# Altium PCB base_tiempo.PcbDoc (part 2 of 2)
Units mil, origin at the board's own origin, x right, y up, seen from the top; angles counter-clockwise.
Board outline 9832.52 x 6640 mil, 2 copper layers (Top Layer, Bottom Layer); 176 components, 434 nets, 905 pads, 136 vias.
Unrouted connection lines stored in the file: 2.
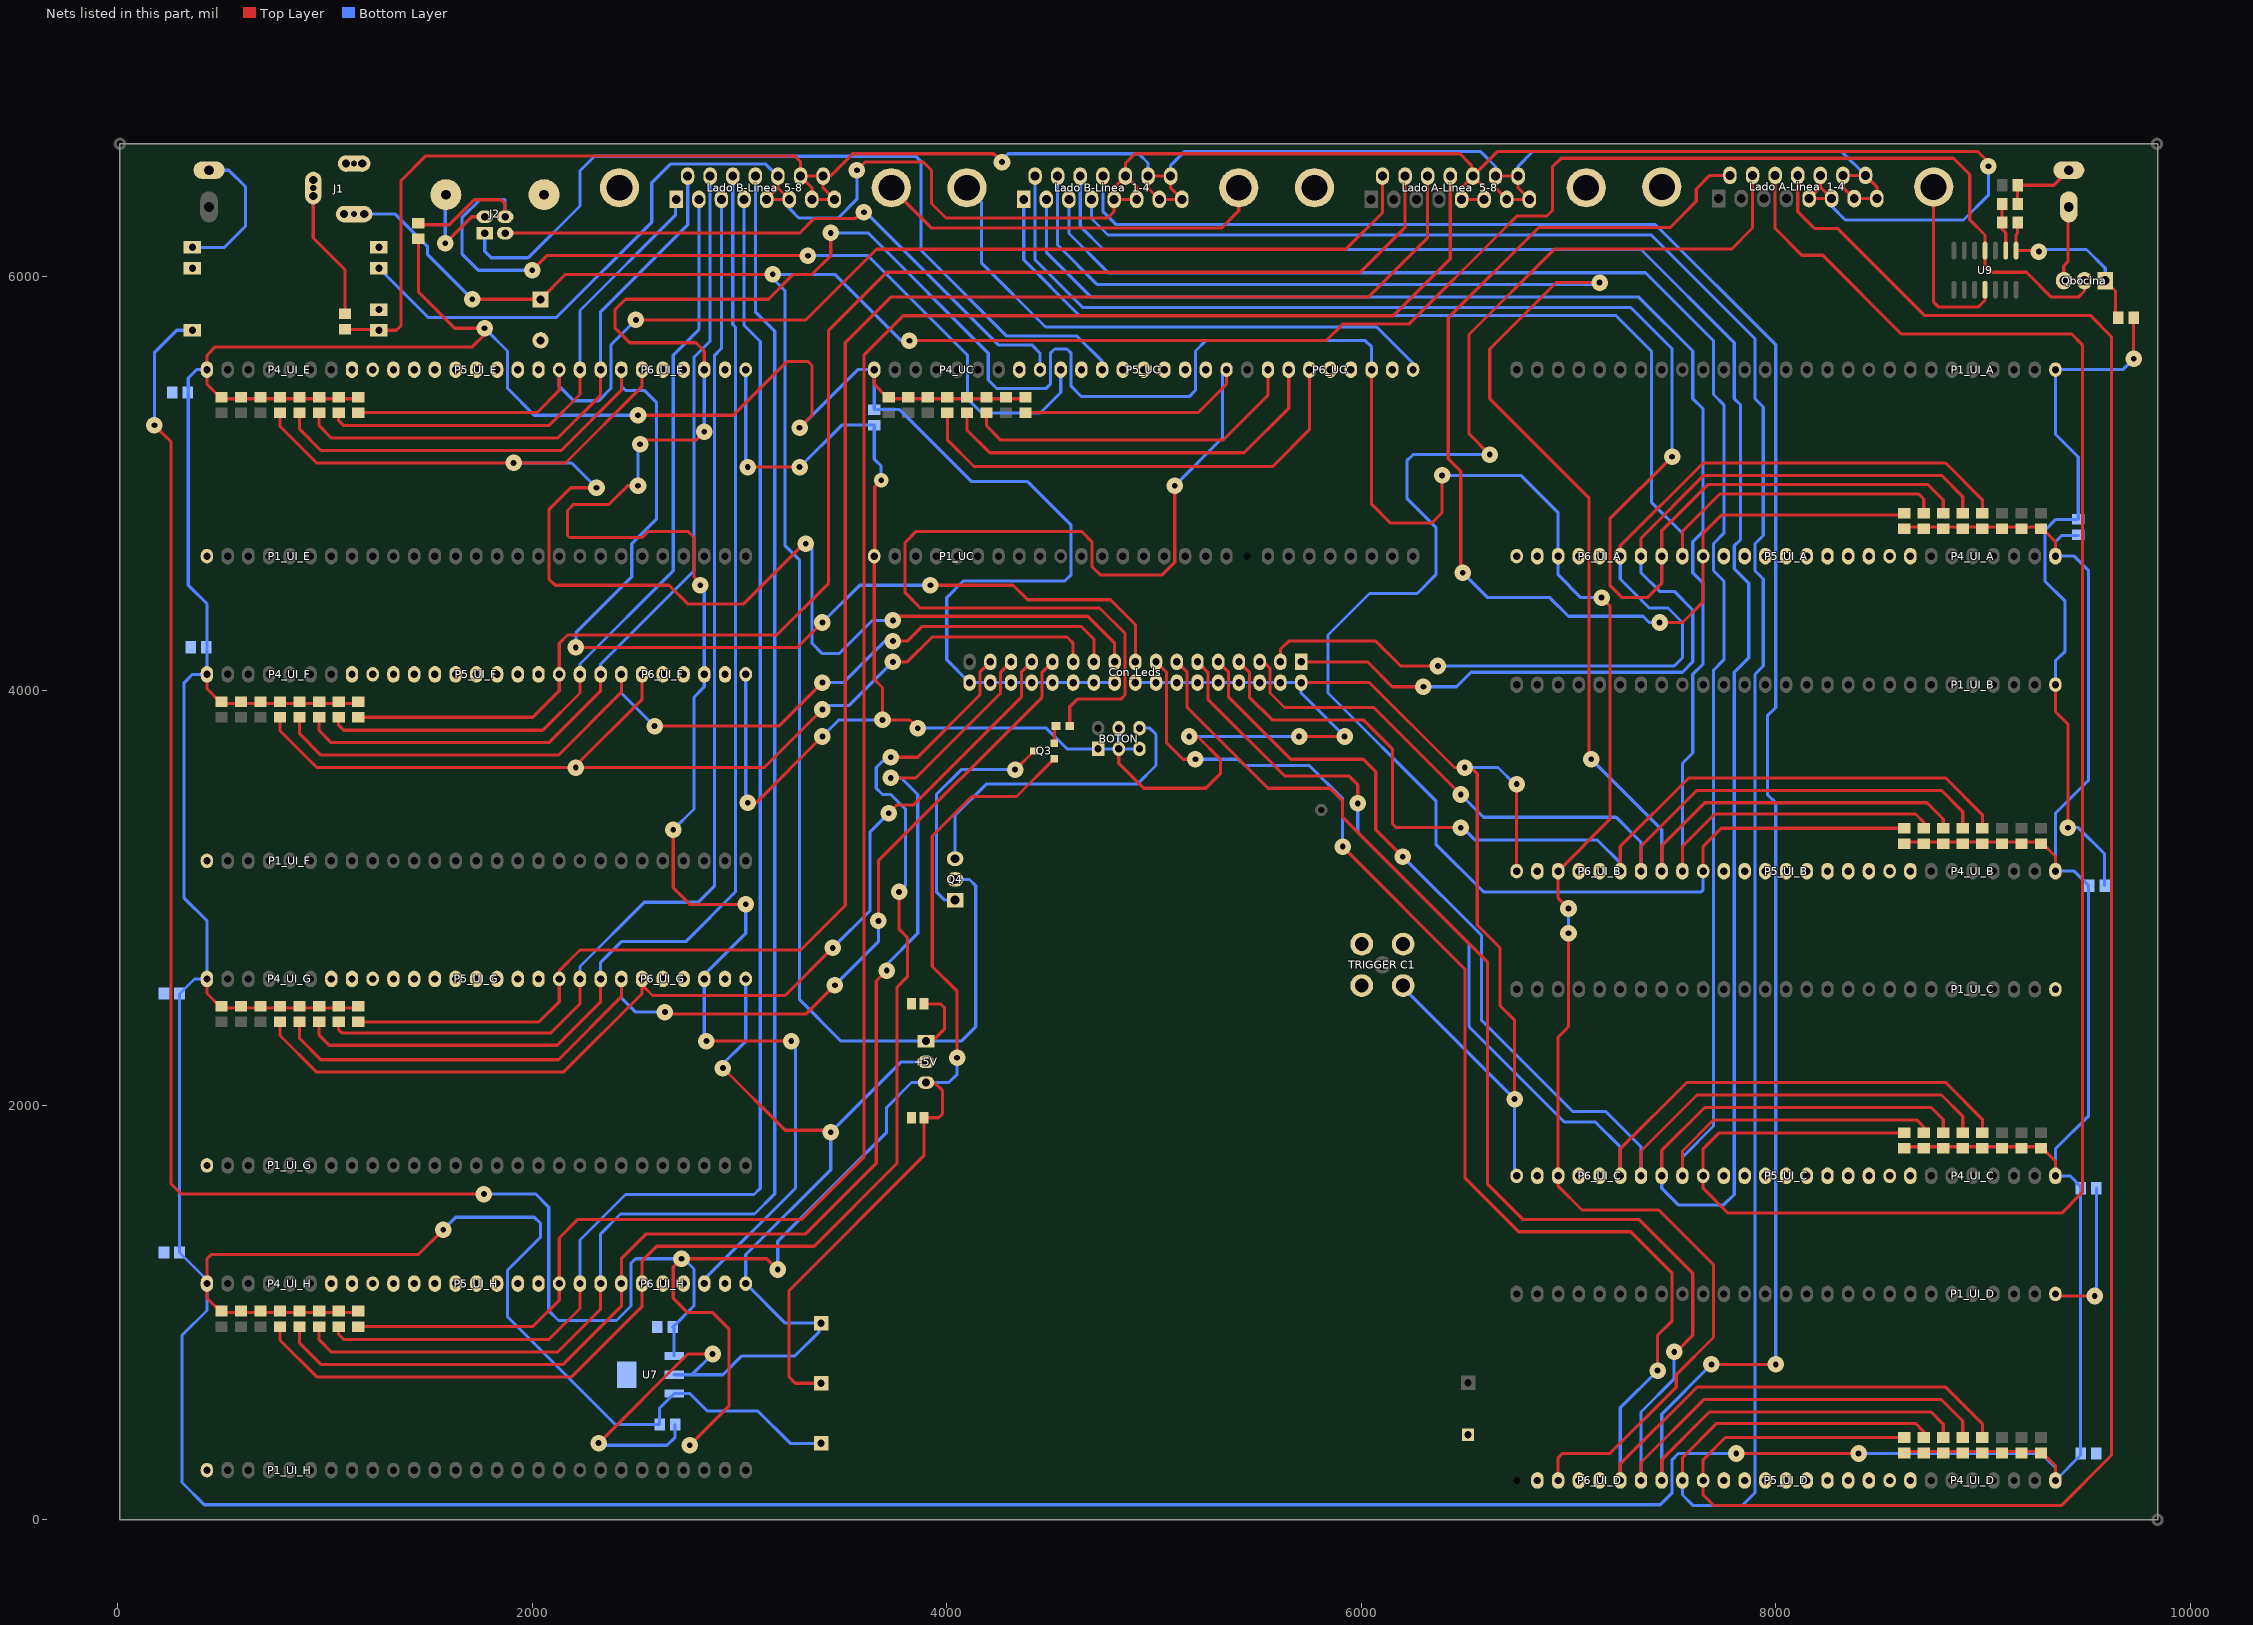
[diagram p2: the nets of this part, all layers, seen from the top]

## Via types
v1: diameter 80, hole 28, Top Layer to Bottom Layer, 135 vias
v2: diameter 70, hole 28, Top Layer to Bottom Layer, 1 vias

## Nets (pads, with @x,y where several pads share a name; then routed paths per layer and width w, separated by ;. In a path a pad name is that pad's centre, name@x,y a point inside that pad or via, vN(x,y) a via of type N, cw(c..) or ccw(c..) an arc to the next point about the centre after c; other vN are vias at no path point) (continued)
34_UI_G: P4_UI_G.3
34_UI_H: P4_UI_H.3
35_UC: P4_UC.2
35_UI_A: P4_UI_A.2
35_UI_B: P4_UI_B.2
35_UI_C: P4_UI_C.2
35_UI_D: P4_UI_D.2
35_UI_E: P4_UI_E.2
35_UI_F: P4_UI_F.2
35_UI_G: P4_UI_G.2
35_UI_H: P4_UI_H.2
36_UC: J2.2 P4_UC.1 pad.0@4449.58,5549.11 | length 2984.3
  Top Layer w15: J2.2@1868.79,6208.17 3288.64,6208.17 3359.58,6279.11 3559.58,6279.11 3589.58,6309.11 v1(3599.58,6309.11)
  Bottom Layer w15: v1(3599.58,6309.11) 3607.89,6309.11 4247.89,5669.11 4409.58,5669.11 4449.58,5629.11 P4_UC.1@4449.58,5549.11
36_UI_A: P4_UI_A.1 pad.8
36_UI_B: P4_UI_B.1 pad.14
36_UI_C: P4_UI_C.1 pad.20
36_UI_D: P4_UI_D.1 pad.25
36_UI_E: P4_UI_E.1 pad.52
36_UI_F: P4_UI_F.1 pad.46
36_UI_G: P4_UI_G.1 pad.38
36_UI_H: P4_UI_H.1 pad.32
37_UC: J2.3 P5_UC.9 R_PU_USB.1 | length 4583.3
  Top Layer w15: R_PU_USB.1@1449.58,6248.64 1599.11,6248.64 1719.58,6369.11 1849.58,6369.11 1868.79,6349.9 J2.3@1868.79,6286.91 ; v1(1999.58,6029.11) 2069.58,6099.11 v1(3329.58,6099.11)
  Bottom Layer w15: J2.3@1868.79,6286.91 1868.79,6369.9 1746.9,6369.9 1659.58,6282.58 1659.58,6109.11 1739.58,6029.11 v1(1999.58,6029.11) ; v1(3329.58,6099.11) 3619.58,6099.11 4099.58,5619.11 4099.58,5409.11 4169.58,5339.11 4449.58,5339.11 4549.58,5439.11 P5_UC.9@4549.58,5549.11
37_UI_A: P5_UI_A.9
37_UI_B: P5_UI_B.9
37_UI_C: P5_UI_C.9
37_UI_D: P5_UI_D.9
37_UI_E: P5_UI_E.9
37_UI_F: P5_UI_F.9
37_UI_G: P5_UI_G.9
37_UI_H: P5_UI_H.9
38_UC: P5_UC.8
38_UI_A: P5_UI_A.8
38_UI_B: P5_UI_B.8
38_UI_C: P5_UI_C.8
38_UI_D: P5_UI_D.8
38_UI_E: P5_UI_E.8
38_UI_F: P5_UI_F.8
38_UI_G: P5_UI_G.8
38_UI_H: P5_UI_H.8
39_UC: J2.1 P5_UC.7 | length 4084
  Bottom Layer w15: J2.1@1770.37,6208.17 1770.37,6119.9 1801.16,6089.11 1979.58,6089.11 2229.58,6339.11 2229.58,6509.11 2299.58,6579.11 3849.58,6579.11 3876,6552.69 3876,6124 4289,5711 4627.69,5711 4749.58,5589.11 P5_UC.7@4749.58,5549.11
39_UI_A: P5_UI_A.7
39_UI_B: P5_UI_B.7
39_UI_C: P5_UI_C.7
39_UI_D: P5_UI_D.7
39_UI_E: P5_UI_E.7
39_UI_F: P5_UI_F.7
39_UI_G: P5_UI_G.7
39_UI_H: P5_UI_H.7
40_UC: P5_UC.6
40_UI_A: P5_UI_A.6
40_UI_B: P5_UI_B.6
40_UI_C: P5_UI_C.6
40_UI_D: P5_UI_D.6
40_UI_E: P5_UI_E.6
40_UI_F: P5_UI_F.6
40_UI_G: P5_UI_G.6
40_UI_H: P5_UI_H.6
41_UC: P5_UC.5
41_UI_A: P5_UI_A.5
41_UI_B: P5_UI_B.5
41_UI_C: P5_UI_C.5
41_UI_D: P5_UI_D.5
41_UI_E: P5_UI_E.5
41_UI_F: P5_UI_F.5
41_UI_G: P5_UI_G.5
41_UI_H: P5_UI_H.5
42_UC: P5_UC.4
42_UI_A: P5_UI_A.4
42_UI_B: P5_UI_B.4
42_UI_C: P5_UI_C.4
42_UI_D: P5_UI_D.4
42_UI_E: P5_UI_E.4
42_UI_F: P5_UI_F.4
42_UI_G: P5_UI_G.4
42_UI_H: P5_UI_H.4
43_UC: P5_UC.3
43_UI_A: P5_UI_A.3
43_UI_B: P5_UI_B.3
43_UI_C: P5_UI_C.3
43_UI_D: P5_UI_D.3
43_UI_E: P5_UI_E.3
43_UI_F: P5_UI_F.3
43_UI_G: P5_UI_G.3
43_UI_H: P5_UI_H.3
44_UC: P5_UC.2
44_UI_A: P5_UI_A.2
44_UI_B: P5_UI_B.2
44_UI_C: P5_UI_C.2
44_UI_D: P5_UI_D.2
44_UI_E: P5_UI_E.2
44_UI_F: P5_UI_F.2
44_UI_G: P5_UI_G.2
44_UI_H: P5_UI_H.2
45_UC: P5_UC.1 pad.3@5349.58,5549.11 R4_UC.1 R_BOTON.2 | length 5707.9
  Top Layer w15: 3799,4689 3799,4715 3853.11,4769.11 4649.58,4769.11 4699.58,4719.11 4699.58,4599.11 4739.58,4559.11 5039.58,4559.11 5099.53,4619.06 ; 3799,4696 3799,4472 3871.89,4399.11 4736.89,4399.11 4859.58,4276.42 4859.58,3979.11 4839.58,3959.11 4629.58,3959.11 4593.05,3922.57 R_BOTON.2@4593.05,3829.11 ; R4_UC.1@4379.58,5341.71 5212.18,5341.71 5349.58,5479.11 P5_UC.1@5349.58,5549.11 ; 5099.58,4619.01 v1(5099.58,4989.11)
  Bottom Layer w15: v1(5099.58,4989.11) 5329.58,5219.11 5329.58,5529.11 P5_UC.1@5349.58,5549.11
45_UI_A: "Lado A-Linea  1-4.9" P5_UI_A.1 pad.9 R4_UI_A.1 | length 5584.5
  Top Layer w15: v1(6489.58,4569.11) 6479.58,4579.11 6479.58,5059.11 6419.58,5119.11 6419.58,5799.11 6856,6235.53 7490.53,6235.53 7616,6361 7616,6421 7681.83,6486.83 7778.83,6486.83 ; v1(7439.58,4329.11) 7449.58,4339.11 7459.58,4329.11 7549.58,4329.11 7649.58,4429.11 P5_UI_A.1@7649.58,4649.11 7649.58,4759.11 7739.11,4848.64 R4_UI_A.1@8619.58,4848.64
  Bottom Layer w15: v1(6489.58,4569.11) 6609.58,4449.11 6909.58,4449.11 6999.58,4359.11 7359.58,4359.11 7389.58,4329.11 v1(7439.58,4329.11)
45_UI_B: "Lado A-Linea  1-4.10" P5_UI_B.1 pad.15 R4_UI_B.1 | length 7948
  Top Layer w15: v1(6619.58,5139.11) 6519.58,5239.11 6519.58,5719.11 6931.47,6131 7786,6131 7887.89,6232.89 7887.89,6486.83 ; P5_UI_B.1@7649.58,3129.11 7649.58,3249.11 7736.98,3336.51 R4_UI_B.1@8619.58,3336.51
  Bottom Layer w15: v1(6619.58,5139.11) 6249.58,5139.11 6219.58,5109.11 6219.58,4929.11 6359.58,4789.11 6359.58,4559.11 6269.58,4469.11 6039.58,4469.11 5839.58,4269.11 5839.58,3989.11 6359.58,3469.11 6359.58,3259.11 6589.58,3029.11 7639.58,3029.11 7649.58,3039.11 P5_UI_B.1@7649.58,3129.11
45_UI_C: "Lado A-Linea  1-4.11" P5_UI_C.1 pad.21 R4_UI_C.1 | length 9174.9
  Top Layer w15: 7996.94,6486.83 7996.94,6230.06 8126,6101 8226,6101 8606,5721 9427.69,5721 9479.58,5669.11 9479.58,1579.11 9379.58,1479.11 7769.58,1479.11 7649.58,1599.11 P5_UI_C.1@7649.58,1659.11 7649.58,1789.11 7726.98,1866.51 R4_UI_C.1@8619.58,1866.51
45_UI_D: "Lado A-Linea  1-4.12" P5_UI_D.1 pad.24 R4_UI_D.1 | length 10613.3
  Top Layer w15: 8106,6486.83 8106,6311 8186,6231 8296,6231 8716,5811 9517.69,5811 9619.58,5709.11 9619.58,309.11 9379.58,69.11 7699.58,69.11 7649.58,119.11 P5_UI_D.1@7649.58,189.11 7649.58,289.11 7756.98,396.51 R4_UI_D.1@8619.58,396.51
45_UI_E: "Lado A-Linea  5-8.9" P5_UI_E.1 pad.51 R4_UI_E.1 | length 5870.9
  Top Layer w15: R4_UI_E.1@1159.58,5341.71 2022.18,5341.71 2129.58,5449.11 P5_UI_E.1@2129.58,5549.11 ; v1(2499.58,5789.11) 3319.58,5789.11 3660.47,6130 5925,6130 6102.17,6307.17 6102.17,6482.89
  Bottom Layer w15: P5_UI_E.1@2129.58,5549.11 2129.58,5469.11 2199.58,5399.11 2319.58,5399.11 2379.58,5459.11 2379.58,5669.11 v1(2499.58,5789.11)
45_UI_F: "Lado A-Linea  5-8.10" P5_UI_F.1 pad.44 R4_UI_F.1 | length 7127.1
  Top Layer w15: R4_UI_F.1@1159.58,3871.71 2002.18,3871.71 2129.58,3999.11 P5_UI_F.1@2129.58,4079.11 2129.58,4229.11 2169.58,4269.11 3179.58,4269.11 3429.58,4519.11 3429.58,5739.11 3709.58,6019.11 5994.11,6019.11 6211.22,6236.22 6211.22,6482.89
45_UI_G: "Lado A-Linea  5-8.11" P5_UI_G.1 pad.39 R4_UI_G.1 | length 8704.1
  Top Layer w15: R4_UI_G.1@1159.58,2401.71 2032.18,2401.71 2129.58,2499.11 P5_UI_G.1@2129.58,2609.11 2129.58,2649.11 2229.58,2749.11 3295.11,2749.11 3509.58,2963.58 3509.58,5679.11 3729.58,5899.11 6034.11,5899.11 6320.28,6185.28 6320.28,6482.89
45_UI_H: "Lado A-Linea  5-8.12" P5_UI_H.1 pad.33 R4_UI_H.1 | length 10245.3
  Top Layer w15: R4_UI_H.1@1159.58,931.71 2002.18,931.71 2129.58,1059.11 P5_UI_H.1@2129.58,1139.11 2129.58,1359.11 2219.58,1449.11 3299.58,1449.11 3599.58,1749.11 3599.58,5619.11 3789.58,5809.11 6154.11,5809.11 6429.33,6084.33 6429.33,6482.89
46_UI_A: "Lado B-Linea  1-4.1" P6_UI_A.9 R5_UI_A.1 | length 6152.5
  Top Layer w15: P6_UI_A.9@7549.58,4649.11 7549.58,4769.11 7729.58,4949.11 8689.58,4949.11 8713.87,4924.82 ; R5_UI_A.1@8713.87,4848.64 8713.87,4924.82 ; R5_UI_A.1@8713.87,4848.64 8713.87,4924.82 ; R5_UI_A.1@8713.87,4848.64 8713.87,4924.82
  Bottom Layer w15: 4370.97,6371.08 4370.97,6079.03 4640,5810 7228.69,5810 7399.58,5639.11 7399.58,4909.11 7549.58,4759.11 P6_UI_A.9@7549.58,4649.11
46_UI_B: "Lado B-Linea  1-4.2" P6_UI_B.9 R5_UI_B.1 | length 7579.9
  Top Layer w15: P6_UI_B.9@7549.58,3129.11 7549.58,3249.11 7705.3,3404.82 8673.87,3404.82 8713.87,3364.82 R5_UI_B.1@8713.87,3336.51
  Bottom Layer w15: 4480.03,6371.08 4480.03,6115.08 4696,5899.11 7339.58,5899.11 7599.58,5639.11 7599.58,5409.11 7649.58,5359.11 7649.58,4769.11 7599.58,4719.11 7599.58,4569.11 7649.58,4519.11 7649.58,4129.11 7599.58,4079.11 7599.58,3699.11 7549.58,3649.11 P6_UI_B.9@7549.58,3129.11
46_UI_C: "Lado B-Linea  1-4.3" P6_UI_C.9 R5_UI_C.1 | length 9053.6
  Top Layer w15: P6_UI_C.9@7549.58,1659.11 7549.58,1779.11 7699.58,1929.11 8679.58,1929.11 8713.87,1894.82 R5_UI_C.1@8713.87,1866.51
  Bottom Layer w15: 4589.08,6371.08 4589.08,6206.03 4778.11,6017 7371.69,6017 7699.58,5689.11 7699.58,5429.11 7749.58,5379.11 7749.58,4759.11 7699.58,4709.11 7699.58,4579.11 7749.58,4529.11 7749.58,4149.11 7699.58,4099.11 7699.58,1899.11 7549.58,1749.11 P6_UI_C.9@7549.58,1659.11
46_UI_D: "Lado B-Linea  1-4.4" P6_UI_D.9 R5_UI_D.1 | length 11023.4
  Top Layer w15: P6_UI_D.9@7549.58,189.11 7549.58,299.11 7715.3,464.82 8673.87,464.82 8713.87,424.82 R5_UI_D.1@8713.87,396.51
  Bottom Layer w15: 4698.14,6371.08 4698.14,6278.86 4777.89,6199.11 7399.58,6199.11 7899.58,5699.11 7899.58,5409.11 7939.58,5369.11 7939.58,4749.11 7899.58,4709.11 7899.58,4579.11 7939.58,4539.11 7939.58,4119.11 7899.58,4079.11 7899.58,129.11 7839.58,69.11 7599.58,69.11 7549.58,119.11 P6_UI_D.9@7549.58,189.11
46_UI_E: "Lado B-Linea  5-8.1" P6_UI_E.9 R5_UI_E.1 | length 2406.2
  Top Layer w15: R5_UI_E.1@1065.3,5341.71 1065.3,5303.4 1089.58,5279.11 2079.58,5279.11 2229.58,5429.11 P6_UI_E.9@2229.58,5549.11
  Bottom Layer w15: P6_UI_E.9@2229.58,5549.11 2229.58,5834.58 2691.47,6296.47 2691.47,6369.19
46_UI_F: "Lado B-Linea  5-8.2" P6_UI_F.9 R5_UI_F.1 | length 3958.9
  Top Layer w15: R5_UI_F.1@1065.3,3871.71 1065.3,3833.4 1089.58,3809.11 2049.58,3809.11 2229.58,3989.11 P6_UI_F.9@2229.58,4079.11
  Bottom Layer w15: P6_UI_F.9@2229.58,4079.11 2229.58,4129.11 2679.58,4579.11 2679.58,5619.11 2763.74,5703.26 ; 2800.53,5740.05 2763.74,5703.26 ; 2803.36,6371.08 2803.36,5742.89 2763.74,5703.26
46_UI_G: "Lado B-Linea  5-8.3" P6_UI_G.9 R5_UI_G.1 | length 5626
  Top Layer w15: R5_UI_G.1@1065.3,2401.71 1065.3,2363.4 1079.58,2349.11 2089.58,2349.11 2229.58,2489.11 P6_UI_G.9@2229.58,2609.11
  Bottom Layer w15: P6_UI_G.9@2229.58,2609.11 2229.58,2669.11 2539.58,2979.11 2799.58,2979.11 2879.58,3059.11 2879.58,5619.11 ; 2909.58,5649.11 2879.58,5619.11 ; 2912.42,6371.08 2912.42,5651.94 2879.58,5619.11
46_UI_H: "Lado B-Linea  5-8.4" P6_UI_H.9 R5_UI_H.1 | length 7382.7
  Top Layer w15: R5_UI_H.1@1065.3,931.71 1065.3,893.4 1089.58,869.11 2079.58,869.11 2229.58,1019.11 P6_UI_H.9@2229.58,1139.11
  Bottom Layer w15: P6_UI_H.9@2229.58,1139.11 2229.58,1349.11 2449.58,1569.11 3069.58,1569.11 3099.58,1599.11 3099.58,5684.78 3021.47,5762.89 3021.47,6371.08
47_UC: P6_UC.8 R6_UC.1 | length 1663.7
  Top Layer w15: R6_UC.1@4191.01,5341.71 4191.01,5277.68 4259.58,5209.11 5332.3,5209.11 5549.58,5426.39 P6_UC.8@5549.58,5549.11
47_UI_A: "Lado B-Linea  1-4.9" P6_UI_A.8 R6_UI_A.1 | length 7173.3
  Top Layer w15: v1(7499.58,5129.11) 7199.58,4829.11 7199.58,4509.11 7259.58,4449.11 7379.58,4449.11 7449.58,4519.11 P6_UI_A.8@7449.58,4649.11 7449.58,4771.83 7671.86,4994.11 8734.58,4994.11 8808.15,4920.54 ; R6_UI_A.1@8808.15,4848.64 8808.15,4920.54 ; R6_UI_A.1@8808.15,4848.64 8808.15,4920.54 ; R6_UI_A.1@8808.15,4848.64 8808.15,4920.54
  Bottom Layer w15: 4425.5,6482.89 4425.5,6079.61 4656,5849.11 7299.58,5849.11 7499.58,5649.11 v1(7499.58,5129.11)
47_UI_B: "Lado B-Linea  1-4.10" P6_UI_B.8 R6_UI_B.1 | length 8199.3
  Top Layer w15: v1(7109.58,3669.11) 7099.58,3679.11 7099.58,4929.11 6619.58,5409.11 6619.58,5649.11 6939.58,5969.11 v1(7149.58,5969.11) ; P6_UI_B.8@7449.58,3129.11 7449.58,3251.83 7656.86,3459.11 8729.58,3459.11 8808.15,3380.54 R6_UI_B.1@8808.15,3336.51
  Bottom Layer w15: 4534.56,6482.89 4534.56,6150.55 4724.11,5961 7141.47,5961 v1(7149.58,5969.11) ; v1(7109.58,3669.11) 7449.58,3329.11 P6_UI_B.8@7449.58,3129.11
47_UI_C: "Lado B-Linea  1-4.11" P6_UI_C.8 R6_UI_C.1 | length 9942.4
  Top Layer w15: P6_UI_C.8@7449.58,1659.11 7449.58,1781.83 7656.86,1989.11 8749.58,1989.11 8808.15,1930.54 R6_UI_C.1@8808.15,1866.51
  Bottom Layer w15: 4643.61,6482.89 4643.61,6241.5 4756,6129.11 7349.58,6129.11 7799.58,5679.11 7799.58,5409.11 7829.58,5379.11 7829.58,4729.11 7799.58,4699.11 7799.58,4589.11 7869.58,4519.11 7869.58,4159.11 7799.58,4089.11 7799.58,1569.11 7749.58,1519.11 7529.58,1519.11 7449.58,1599.11 P6_UI_C.8@7449.58,1659.11
47_UI_D: "Lado B-Linea  1-4.12" P6_UI_D.8 R6_UI_D.1 | length 11247.4
  Top Layer w15: P6_UI_D.8@7449.58,189.11 7449.58,289.11 7679.58,519.11 8749.58,519.11 8808.15,460.54 R6_UI_D.1@8808.15,396.51 ; v1(7689.58,749.11) v1(7999.58,749.11)
  Bottom Layer w15: 4752.67,6482.89 4752.67,6314.33 4817.89,6249.11 7419.58,6249.11 7999.58,5669.11 7999.58,3919.11 7959.58,3879.11 7959.58,3499.11 7999.58,3459.11 v1(7999.58,749.11) ; P6_UI_D.8@7449.58,189.11 7449.58,509.11 v1(7689.58,749.11)
47_UI_E: "Lado B-Linea  5-8.9" P6_UI_E.8 R6_UI_E.1 | length 2763.5
  Top Layer w15: R6_UI_E.1@971.01,5341.71 971.01,5277.68 1029.58,5219.11 2122.3,5219.11 2329.58,5426.39 P6_UI_E.8@2329.58,5549.11
  Bottom Layer w15: P6_UI_E.8@2329.58,5549.11 2329.58,5829.11 2749.58,6249.11 2749.58,6482.14 2748.84,6482.89
47_UI_F: "Lado B-Linea  5-8.10" P6_UI_F.8 R6_UI_F.1 | length 4290.2
  Top Layer w15: R6_UI_F.1@971.01,3871.71 971.01,3807.68 1029.58,3749.11 2079.58,3749.11 2329.58,3999.11 P6_UI_F.8@2329.58,4079.11
  Bottom Layer w15: P6_UI_F.8@2329.58,4079.11 2329.58,4129.11 2779.58,4579.11 2779.58,5609.11 2828.74,5658.26 ; 2855.05,5684.58 2828.74,5658.26 ; 2857.89,6482.89 2857.89,5687.42 2828.74,5658.26
47_UI_G: "Lado B-Linea  5-8.11" P6_UI_G.8 R6_UI_G.1 | length 5969.7
  Top Layer w15: R6_UI_G.1@971.01,2401.71 971.01,2337.68 1019.58,2289.11 2119.58,2289.11 2329.58,2499.11 P6_UI_G.8@2329.58,2609.11
  Bottom Layer w15: P6_UI_G.8@2329.58,2609.11 2329.58,2689.11 2429.58,2789.11 2739.89,2789.11 2979.58,3028.8 2979.58,5754.78 2966.94,5767.42 2966.94,6482.89
47_UI_H: "Lado B-Linea  5-8.12" P6_UI_H.8 R6_UI_H.1 | length 7764.6
  Top Layer w15: R6_UI_H.1@971.01,931.71 971.01,867.68 1029.58,809.11 2122.3,809.11 2329.58,1016.39 P6_UI_H.8@2329.58,1139.11
  Bottom Layer w15: P6_UI_H.8@2329.58,1139.11 2329.58,1379.11 2425.47,1475 3072,1475 3169.58,1572.58 3169.58,5734.78 3076,5828.36 3076,6482.89
48_UC: P6_UC.7 R7_UC.1 | length 1956.8
  Top Layer w15: R7_UC.1@4096.72,5341.71 4096.72,5258.28 4207,5148 5434,5148 5649.58,5363.58 P6_UC.7@5649.58,5549.11
48_UI_A: Con_Leds.1 P6_UI_A.7 R7_UI_A.1 | length 4714.4
  Top Layer w15: Con_Leds.1@5709.58,4139.11 6029.58,4139.11 6149.58,4019.11 v1(6299.58,4019.11) ; P6_UI_A.7@7349.58,4649.11 7349.58,4735.47 7653.22,5039.11 8799.58,5039.11 8902.44,4936.25 ; R7_UI_A.1@8902.44,4848.64 8902.44,4936.25 ; R7_UI_A.1@8902.44,4848.64 8902.44,4936.25 ; R7_UI_A.1@8902.44,4848.64 8902.44,4936.25
  Bottom Layer w15: v1(6299.58,4019.11) 6459.58,4019.11 6529.58,4089.11 7549.58,4089.11 7599.58,4139.11 7599.58,4389.11 7509.58,4479.11 7439.58,4479.11 7349.58,4569.11 P6_UI_A.7@7349.58,4649.11
48_UI_B: Con_Leds.5 P6_UI_B.7 R7_UI_B.1 | length 4317.7
  Top Layer w15: Con_Leds.5@5509.58,4139.11 5529.58,4139.11 5559.58,4109.11 5559.58,3989.11 5629.58,3919.11 6059.58,3919.11 v1(6479.58,3499.11) ; P6_UI_B.7@7349.58,3129.11 7349.58,3249.11 7619.58,3519.11 8799.58,3519.11 8902.44,3416.25 R7_UI_B.1@8902.44,3336.51
  Bottom Layer w15: v1(6479.58,3499.11) 6589.58,3389.11 7229.58,3389.11 7349.58,3269.11 P6_UI_B.7@7349.58,3129.11
48_UI_C: Con_Leds.9 P6_UI_C.7 R7_UI_C.1 | length 5530.8
  Top Layer w15: Con_Leds.9@5309.58,4139.11 5359.58,4089.11 5359.58,3969.11 5659.58,3669.11 6009.58,3669.11 6069.58,3609.11 6069.58,3329.11 v1(6199.58,3199.11) ; P6_UI_C.7@7349.58,1659.11 7349.58,1779.11 7619.58,2049.11 8799.58,2049.11 8902.44,1946.25 R7_UI_C.1@8902.44,1866.51
  Bottom Layer w15: v1(6199.58,3199.11) 6579.58,2819.11 6579.58,2409.11 7019.58,1969.11 7179.58,1969.11 7349.58,1799.11 P6_UI_C.7@7349.58,1659.11
48_UI_D: Con_Leds.13 P6_UI_D.7 R7_UI_D.1 | length 7481.9
  Top Layer w15: Con_Leds.13@5109.58,4139.11 5159.58,4089.11 5159.58,3919.11 5549.58,3529.11 5849.58,3529.11 5909.58,3469.11 5909.58,3389.11 6609.58,2689.11 6609.58,1619.11 6779.58,1449.11 7339.58,1449.11 7599.58,1189.11 7599.58,889.11 7519.58,809.11 v1(7509.58,809.11) ; P6_UI_D.7@7349.58,189.11 7349.58,275.47 7653.22,579.11 8799.58,579.11 8902.44,476.25 R7_UI_D.1@8902.44,396.51
  Bottom Layer w15: P6_UI_D.7@7349.58,189.11 7349.58,519.11 7509.58,679.11 v1(7509.58,809.11)
48_UI_E: Con_Leds.17 P6_UI_E.7 R7_UI_E.1 | length 6603
  Top Layer w15: R7_UI_E.1@876.72,5341.71 876.72,5261.97 979.58,5159.11 2139.58,5159.11 2429.58,5449.11 P6_UI_E.7@2429.58,5549.11 ; v1(2209.58,4209.11) 3279.58,4209.11 v1(3399.58,4329.11) ; v1(3920.86,4509.11) 4319.58,4509.11 4389.58,4439.11 4789.58,4439.11 4909.58,4319.11 Con_Leds.17@4909.58,4139.11
  Bottom Layer w15: v1(2209.58,4209.11) 2209.58,4279.11 2479.58,4549.11 2479.58,4709.11 2599.58,4829.11 2599.58,5389.11 2539.58,5449.11 2449.58,5449.11 2429.58,5469.11 P6_UI_E.7@2429.58,5549.11 ; v1(3399.58,4329.11) 3579.58,4509.11 v1(3920.86,4509.11)
48_UI_F: Con_Leds.21 P6_UI_F.7 R7_UI_F.1 | length 4657.3
  Top Layer w15: R7_UI_F.1@876.72,3871.71 876.72,3791.97 979.58,3689.11 2125.94,3689.11 2429.58,3992.75 P6_UI_F.7@2429.58,4079.11 ; v1(2589.58,3829.11) 3189.58,3829.11 v1(3399.58,4039.11) ; v1(3739.58,4239.11) 3809.58,4239.11 3879.58,4309.11 4649.58,4309.11 4709.58,4249.11 Con_Leds.21@4709.58,4139.11
  Bottom Layer w15: P6_UI_F.7@2429.58,4079.11 2429.58,3989.11 v1(2589.58,3829.11) ; v1(3399.58,4039.11) 3499.58,4039.11 3699.58,4239.11 v1(3739.58,4239.11)
48_UI_G: Con_Leds.25 P6_UI_G.7 R7_UI_G.1 | length 5093.4
  Top Layer w15: R7_UI_G.1@876.72,2401.71 876.72,2321.97 979.58,2219.11 2125.94,2219.11 2429.58,2522.75 P6_UI_G.7@2429.58,2609.11 ; v1(2639.58,2449.11) 2649.58,2439.11 3319.58,2439.11 v1(3459.58,2579.11) ; v1(3669.58,2889.11) 3669.58,3179.11 4459.58,3969.11 4459.58,4089.11 Con_Leds.25@4509.58,4139.11
  Bottom Layer w15: P6_UI_G.7@2429.58,2609.11 2429.58,2519.11 2499.58,2449.11 v1(2639.58,2449.11) ; v1(3459.58,2579.11) 3669.58,2789.11 v1(3669.58,2889.11)
48_UI_H: Con_Leds.29 P6_UI_H.7 R7_UI_H.1 | length 6338.2
  Top Layer w15: R7_UI_H.1@876.72,931.71 876.72,851.97 979.58,749.11 2149.58,749.11 2429.58,1029.11 P6_UI_H.7@2429.58,1139.11 2429.58,1259.11 2549.58,1379.11 3319.58,1379.11 3659.58,1719.11 3659.58,2599.11 v1(3709.58,2649.11) ; v1(3729.58,3579.11) 3849.58,3579.11 4259.58,3989.11 4259.58,4089.11 Con_Leds.29@4309.58,4139.11
  Bottom Layer w15: v1(3709.58,2649.11) 3709.58,2679.11 3859.58,2829.11 3859.58,3499.11 3779.58,3579.11 v1(3729.58,3579.11)
49_UC: P6_UC.6 R8_UC.1 | length 2294.6
  Top Layer w15: R8_UC.1@4002.44,5341.71 4002.44,5210.56 4131,5082 5572,5082 5749.58,5259.58 P6_UC.6@5749.58,5549.11
49_UI_A: Con_Leds.3 P6_UI_A.6 R8_UI_A.1 | length 5006
  Top Layer w15: Con_Leds.3@5609.58,4139.11 5609.58,4199.11 5649.58,4239.11 6069.58,4239.11 6189.58,4119.11 v1(6369.58,4119.11) ; P6_UI_A.6@7249.58,4649.11 7249.58,4699.11 7649.58,5099.11 8819.58,5099.11 8996.73,4921.97 ; R8_UI_A.1@8996.73,4848.64 8996.73,4921.97 ; R8_UI_A.1@8996.73,4848.64 8996.73,4921.97 ; R8_UI_A.1@8996.73,4848.64 8996.73,4921.97
  Bottom Layer w15: v1(6369.58,4119.11) 7509.58,4119.11 7549.58,4159.11 7549.58,4329.11 7479.58,4399.11 7389.58,4399.11 7249.58,4539.11 P6_UI_A.6@7249.58,4649.11
49_UI_B: Con_Leds.7 P6_UI_B.6 R8_UI_B.1 | length 4705.6
  Top Layer w15: Con_Leds.7@5409.58,4139.11 5459.58,4089.11 5459.58,3969.11 5569.58,3859.11 6009.58,3859.11 6149.58,3719.11 6149.58,3359.11 6169.58,3339.11 v1(6479.58,3339.11) ; P6_UI_B.6@7249.58,3129.11 7249.58,3249.11 7579.58,3579.11 8819.58,3579.11 8996.73,3401.97 R8_UI_B.1@8996.72,3336.51
  Bottom Layer w15: v1(6479.58,3339.11) 6489.58,3339.11 6549.58,3279.11 7139.58,3279.11 7249.58,3169.11 P6_UI_B.6@7249.58,3129.11
49_UI_C: Con_Leds.11 P6_UI_C.6 R8_UI_C.1 | length 5743
  Top Layer w15: Con_Leds.11@5209.58,4139.11 5259.58,4089.11 5259.58,3959.11 5629.58,3589.11 5939.58,3589.11 5982.79,3545.9 v1(5982.79,3455.9) ; P6_UI_C.6@7249.58,1659.11 7249.58,1789.11 7569.58,2109.11 8819.58,2109.11 8996.73,1931.97 R8_UI_C.1@8996.72,1866.51
  Bottom Layer w15: v1(5982.79,3455.9) 5982.79,3315.9 6519.58,2779.11 6519.58,2379.11 6979.58,1919.11 7129.58,1919.11 7249.58,1799.11 P6_UI_C.6@7249.58,1659.11
49_UI_D: Con_Leds.15 P6_UI_D.6 R8_UI_D.1 | length 7860.3
  Top Layer w15: Con_Leds.15@5009.58,4139.11 5059.58,4089.11 5059.58,3749.11 5139.58,3669.11 v1(5199.58,3669.11) ; v1@5909.58,3247.42 6499.58,2657.42 6499.58,1649.11 6759.58,1389.11 7299.58,1389.11 7499.58,1189.11 7499.58,959.11 7429.58,889.11 v1(7429.58,719.11) ; P6_UI_D.6@7249.58,189.11 7249.58,269.11 7619.58,639.11 8819.58,639.11 8996.73,461.97 R8_UI_D.1@8996.72,396.51
  Bottom Layer w15: v1(5199.58,3669.11) 5406.53,3669.11 5436.53,3639.11 5749.58,3639.11 5909.58,3479.11 v1@5909.58,3247.42 ; P6_UI_D.6@7249.58,189.11 7249.58,539.11 v1(7429.58,719.11)
  other v1: 5910,3248
49_UI_E: Con_Leds.19 P6_UI_E.6 R8_UI_E.1 | length 6784.3
  Top Layer w15: R8_UI_E.1@782.44,5341.71 782.44,5276.25 959.58,5099.11 v1(1909.58,5099.11) 2159.58,5099.11 2529.58,5469.11 P6_UI_E.6@2529.58,5549.11 ; v1(2309.58,4979.11) 2185.11,4979.11 2079.58,4873.58 2079.58,4539.11 2109.58,4509.11 2659.58,4509.11 2749.58,4419.11 3019.58,4419.11 3309.58,4709.11 v1(3319.58,4709.11) ; v1(3739.58,4339.11) 3759.58,4359.11 4679.58,4359.11 4809.58,4229.11 Con_Leds.19@4809.58,4139.11
  Bottom Layer w15: v1(1909.58,5099.11) 2189.58,5099.11 v1(2309.58,4979.11) ; v1(3319.58,4709.11) 3329.58,4709.11 3349.58,4689.11 3349.58,4229.11 3399.58,4179.11 3479.58,4179.11 3639.58,4339.11 v1(3739.58,4339.11)
49_UI_F: Con_Leds.23 P6_UI_F.6 R8_UI_F.1 | length 4916
  Top Layer w15: R8_UI_F.1@782.44,3871.71 782.44,3806.25 959.58,3629.11 v1@2199.58,3629.11 ; P6_UI_F.6@2529.58,4079.11 2529.58,3959.11 v1@2199.58,3629.11 ; v1(3399.58,3909.11) 3119.58,3629.11 v1@2199.58,3629.11 ; v1(3739.58,4139.11) 3809.58,4139.11 3929.58,4259.11 4579.58,4259.11 4609.58,4229.11 Con_Leds.23@4609.58,4139.11
  Bottom Layer w15: v1(3399.58,3909.11) 3419.58,3929.11 3529.58,3929.11 v1(3739.58,4139.11)
  other v1: 2209.58,3629.11
49_UI_G: Con_Leds.27 P6_UI_G.6 R8_UI_G.1 | length 4973.9
  Top Layer w15: R8_UI_G.1@782.44,2401.71 782.44,2336.25 959.58,2159.11 2149.58,2159.11 2529.58,2539.11 P6_UI_G.6@2529.58,2579.11 ; P6_UI_G.6@2529.58,2609.11 P6_UI_G.6@2529.58,2579.11 ; v1(3449.58,2759.11) 3219.58,2529.11 2579.58,2529.11 P6_UI_G.6@2529.58,2579.11 ; v1(3719.58,3409.11) 3759.58,3449.11 3839.58,3449.11 4359.58,3969.11 4359.58,4089.11 Con_Leds.27@4409.58,4139.11
  Bottom Layer w15: v1(3449.58,2759.11) 3629.58,2939.11 3629.58,3319.11 v1(3719.58,3409.11)
49_UI_H: Con_Leds.31 P6_UI_H.6 R8_UI_H.1 | length 6538.3
  Top Layer w15: R8_UI_H.1@782.44,931.71 782.44,866.25 959.58,689.11 2189.58,689.11 2529.58,1029.11 P6_UI_H.6@2529.58,1139.11 2529.58,1249.11 2599.58,1319.11 3359.58,1319.11 3759.58,1719.11 3759.58,2569.11 3809.58,2619.11 3809.58,2809.11 3769.58,2849.11 v1(3769.58,3029.11) ; v1(3729.58,3679.11) 3859.58,3679.11 4159.58,3979.11 4159.58,4089.11 Con_Leds.31@4209.58,4139.11
  Bottom Layer w15: v1(3729.58,3679.11) 3709.58,3679.11 3659.58,3629.11 3659.58,3529.11 3689.58,3499.11 3729.58,3499.11 3799.58,3429.11 3799.58,3059.11 v1(3769.58,3029.11)
50_UC: P6_UC.5
50_UI_A: P6_UI_A.5
50_UI_B: P6_UI_B.5
50_UI_C: P6_UI_C.5
50_UI_D: P6_UI_D.5
50_UI_E: P6_UI_E.5
50_UI_F: P6_UI_F.5
50_UI_G: P6_UI_G.5
50_UI_H: P6_UI_H.5
51_UC: P6_UC.4
51_UI_A: P6_UI_A.4
51_UI_B: P6_UI_B.4
51_UI_C: P6_UI_C.4
51_UI_D: P6_UI_D.4
51_UI_E: P6_UI_E.4
51_UI_F: P6_UI_F.4
51_UI_G: P6_UI_G.4
51_UI_H: P6_UI_H.4
52_UC: P6_UC.3 P6_UI_A.3 P6_UI_B.3 P6_UI_C.3 P6_UI_D.3 P6_UI_E.3 P6_UI_F.3 P6_UI_G.3 P6_UI_H.3 | length 20085.1
  Top Layer w15: v1(2509.58,4989.11) 2459.58,4989.11 2369.47,4899 2199,4899 2169.58,4869.58 2169.58,4749.11 2179.58,4739.11 2529.58,4739.11 2559.58,4769.11 2749.58,4769.11 2779.58,4739.11 2779.58,4549.11 2809.58,4519.11 v1(2809.58,4509.11) ; v1(2519.58,5189.11) 2539.58,5209.11 2789.58,5209.11 v1(2829.58,5249.11) ; v1(2679.58,3329.11) 2679.58,3049.11 2759.58,2969.11 v1(3029.58,2969.11) ; P6_UI_E.3@2829.58,5549.11 2829.58,5639.11 2789.58,5679.11 2469.58,5679.11 2399.58,5749.11 2399.58,5839.11 2449.58,5889.11 3139.58,5889.11 3259.58,6009.11 3349.58,6009.11 3439.58,6099.11 v1(3439.58,6209.11) ; v1(2839.58,2309.11) v1(3249.58,2309.11) ; P6_UC.3@6049.58,5549.11 6049.58,4899.11 6139.58,4809.11 6339.58,4809.11 6389.58,4859.11 v1(6389.58,5039.11) ; P6_UI_D.3@6949.58,189.11 6949.58,299.11 6969.58,319.11 7199.58,319.11 7519.58,639.11 7519.58,699.11 7699.58,879.11 7699.58,1229.11 7434.58,1494.11 7064.58,1494.11 6949.58,1609.11 P6_UI_C.3@6949.58,1659.11 6949.58,2329.11 6999.58,2379.11 v1(6999.58,2829.11) ; v1(6999.58,2949.11) 6949.58,2999.11 P6_UI_B.3@6949.58,3129.11 7199.58,3379.11 7199.58,4409.11 v1(7159.58,4449.11)
  Bottom Layer w15: v1(2509.58,4989.11) 2509.58,5179.11 v1(2519.58,5189.11) ; v1(2679.58,3329.11) 2779.58,3429.11 2779.58,3969.11 2829.58,4019.11 P6_UI_F.3@2829.58,4079.11 2829.58,4479.11 2809.58,4499.11 v1(2809.58,4509.11) ; P6_UI_H.3@2829.58,1139.11 2829.58,1159.58 3269.58,1599.58 3269.58,2289.11 v1(3249.58,2309.11) ; v1(2829.58,5249.11) P6_UI_E.3@2829.58,5549.11 ; v1(2839.58,2309.11) 2829.58,2319.11 P6_UI_G.3@2829.58,2609.11 2829.58,2629.11 3029.58,2829.11 v1(3029.58,2969.11) ; v1(3439.58,6209.11) 3619.58,6209.11 4199.58,5629.11 4199.58,5499.11 4239.58,5459.11 4479.58,5459.11 4499.58,5479.11 4499.58,5629.11 4519.58,5649.11 4579.58,5649.11 4599.58,5629.11 4599.58,5469.11 4649.58,5419.11 5169.58,5419.11 5199.58,5449.11 5199.58,5639.11 5249.58,5689.11 6019.58,5689.11 6049.58,5659.11 P6_UC.3@6049.58,5549.11 ; v1(6389.58,5039.11) 6769.58,5039.11 6949.58,4859.11 P6_UI_A.3@6949.58,4649.11 6949.58,4559.11 7059.58,4449.11 v1(7159.58,4449.11) ; v1(6999.58,2829.11) v1(6999.58,2949.11)
53_UC: P6_UC.2
53_UI_A: P6_UI_A.2
53_UI_B: P6_UI_B.2
53_UI_C: P6_UI_C.2
53_UI_D: P6_UI_D.2
53_UI_E: P6_UI_E.2
53_UI_F: P6_UI_F.2
53_UI_G: P6_UI_G.2
53_UI_H: P6_UI_H.2
+3.3V: 3.3V.1 C5.1 CAL1_UC.1 CAL1_UI_A.1 CAL1_UI_B.1 CAL1_UI_C.1 CAL1_UI_D.1 CAL1_UI_E.1 CAL1_UI_F.1 CAL1_UI_G.1 CAL1_UI_H.1 Con_Leds.20 Con_Leds.22 Con_Leds.24 Con_Leds.26 Con_Leds.28 Con_Leds.30 Con_Leds.32 Con_Leds.34 P4_UC.9 P4_UI_A.9 P4_UI_B.9 P4_UI_C.9 P4_UI_D.9 P4_UI_E.9 P4_UI_F.9 P4_UI_G.9 P4_UI_H.9 R1_UC.2 R1_UI_A.2 R1_UI_B.2 R1_UI_C.2 R1_UI_D.2 R1_UI_E.2 R1_UI_F.2 R1_UI_G.2 R1_UI_H.2 R2_UC.2 R2_UI_A.2 R2_UI_B.2 R2_UI_C.2 R2_UI_D.2 R2_UI_E.2 R2_UI_F.2 R2_UI_G.2 R2_UI_H.2 R3_UC.2 R3_UI_A.2 R3_UI_B.2 R3_UI_C.2 R3_UI_D.2 R3_UI_E.2 R3_UI_F.2 R3_UI_G.2 R3_UI_H.2 R4_UC.2 R4_UI_A.2 R4_UI_B.2 R4_UI_C.2 R4_UI_D.2 R4_UI_E.2 R4_UI_F.2 R4_UI_G.2 R4_UI_H.2 R5_UC.2 R5_UI_A.2 R5_UI_B.2 R5_UI_C.2 R5_UI_D.2 R5_UI_E.2 R5_UI_F.2 R5_UI_G.2 R5_UI_H.2 R6_UC.2 R6_UI_A.2 R6_UI_B.2 R6_UI_C.2 R6_UI_D.2 R6_UI_E.2 R6_UI_F.2 R6_UI_G.2 R6_UI_H.2 R7_UC.2 R7_UI_A.2 R7_UI_B.2 R7_UI_C.2 R7_UI_D.2 R7_UI_E.2 R7_UI_F.2 R7_UI_G.2 R7_UI_H.2 R8_UC.2 R8_UI_A.2 R8_UI_B.2 R8_UI_C.2 R8_UI_D.2 R8_UI_E.2 R8_UI_F.2 R8_UI_G.2 R8_UI_H.2 R_PU_USB.2 U7.3 | length 40407
  Top Layer w15: P4_UI_G.9@429.58,2609.11 429.58,2538.64 495.65,2472.58 499.58,2468.64 593.87,2468.64 876.72,2468.64 971.01,2468.64 R4_UI_G.2@1159.58,2468.64 ; P4_UI_F.9@429.58,4079.11 429.58,4008.64 495.65,3942.58 499.58,3938.64 688.15,3938.64 782.44,3938.64 876.72,3938.64 971.01,3938.64 R4_UI_F.2@1159.58,3938.64 ; R4_UI_H.2@1159.58,998.64 782.44,998.64 593.87,998.64 499.58,998.64 495.65,1002.58 429.58,1068.64 P4_UI_H.9@429.58,1139.11 429.58,1259.11 449.58,1279.11 1449.58,1279.11 v1(1569.58,1399.11) ; R4_UI_E.2@1159.58,5408.64 971.01,5408.64 876.72,5408.64 782.44,5408.64 593.87,5408.64 499.58,5408.64 495.65,5412.58 429.58,5478.64 P4_UI_E.9@429.58,5549.11 429.58,5619.11 469.58,5659.11 1709.58,5659.11 1769.58,5719.11 v1(1769.58,5749.11) 1625.89,5749.11 1449.58,5925.42 R_PU_USB.2@1449.58,6181.71 R_PU_USB.2@1449.58,6189.58 ; v1(2509.58,5329.11) 2969.58,5329.11 3229.58,5589.11 3329.58,5589.11 3349.58,5569.11 3349.58,5329.11 v1(3289.58,5269.11) ; P4_UC.9@3649.58,5549.11 3649.58,5478.64 3715.65,5412.58 3719.58,5408.64 3813.87,5408.64 3908.15,5408.64 4002.44,5408.64 4096.72,5408.64 4285.3,5408.64 R4_UC.2@4379.58,5408.64 ; v1(7809.58,319.11) v1(8399.58,319.11) ; R4_UI_D.2@8619.58,329.58 8996.72,329.58 9279.58,329.58 9283.52,325.65 9349.58,259.58 P4_UI_D.9@9349.58,189.11 ; R4_UI_C.2@8619.58,1799.58 8713.87,1799.58 8808.15,1799.58 8902.44,1799.58 8996.72,1799.58 9091.01,1799.58 9279.58,1799.58 9283.52,1795.65 9349.58,1729.58 P4_UI_C.9@9349.58,1659.11 ; R4_UI_B.2@8619.58,3269.58 8713.87,3269.58 8808.15,3269.58 9091.01,3269.58 9279.58,3269.58 9283.52,3265.65 9349.58,3199.58 P4_UI_B.9@9349.58,3129.11 ; R4_UI_A.2@8619.58,4789.58 8713.87,4789.58 8808.15,4789.58 8902.44,4789.58 8996.73,4789.58 9091.01,4789.58 9185.3,4789.58 9279.58,4789.58 9349.58,4719.58 P4_UI_A.9@9349.58,4649.11
  Bottom Layer w15: P4_UI_E.9@429.58,5549.11 379.58,5549.11 339.58,5509.11 339.58,4509.11 429.58,4419.11 P4_UI_F.9@429.58,4079.11 359.58,4079.11 319.58,4039.11 319.58,2999.11 429.58,2889.11 P4_UI_G.9@429.58,2609.11 369.58,2609.11 296.98,2536.51 CAL1_UI_H.1@296.98,1289.11 429.58,1156.51 P4_UI_H.9@429.58,1139.11 429.58,1009.11 309.58,889.11 309.58,179.11 417.08,71.61 7442.08,71.61 7499.58,129.11 7499.58,289.11 7529.58,319.11 v1(7809.58,319.11) ; v1(1569.58,1399.11) 1629.58,1459.11 2009.58,1459.11 2039.58,1429.11 2039.58,1363.58 1879.58,1203.58 1879.58,979.11 2399.58,459.11 C5.1@2613.93,459.11 2613.93,538.73 U7.3@2683.76,608.56 2760.13,608.56 2844.62,524.07 3087.93,524.07 3244,368 3.3V.1@3393,368 ; v1(1769.58,5749.11) 1879.58,5639.11 1879.58,5459.11 2009.58,5329.11 v1(2509.58,5329.11) ; v1(3289.58,5269.11) 3569.58,5549.11 P4_UC.9@3649.58,5549.11 CAL1_UC.1@3649.58,5356.51 3772.18,5356.51 4119.58,5009.11 4389.58,5009.11 4599.58,4799.11 4599.58,4559.11 4569.58,4529.11 4079.58,4529.11 3999.58,4449.11 3999.58,4149.11 Con_Leds.34@4109.58,4039.11 Con_Leds.32@4209.58,4039.11 Con_Leds.30@4309.58,4039.11 Con_Leds.28@4409.58,4039.11 Con_Leds.26@4509.58,4039.11 Con_Leds.24@4609.58,4039.11 Con_Leds.22@4709.58,4039.11 Con_Leds.20@4809.58,4039.11 ; v1(8399.58,319.11) 9279.58,319.11 9349.58,249.11 P4_UI_D.9@9349.58,189.11 9469.58,309.11 9469.58,319.11 9469.58,1609.11 9419.58,1659.11 P4_UI_C.9@9349.58,1659.11 9349.58,1789.11 9509.58,1949.11 9509.58,3059.11 9439.58,3129.11 P4_UI_B.9@9349.58,3129.11 9349.58,3409.11 9509.58,3569.11 9509.58,4579.11 9439.58,4649.11 P4_UI_A.9@9349.58,4649.11 9349.58,4719.11 9379.58,4749.11 CAL1_UI_A.1@9459.58,4749.11
BOCINA: BOCINA.2B Qbocina.3 | length 303.8
  Top Layer w15: Qbocina.3@9389.58,5979.11 9389.58,6049.11 9409.58,6069.11 BOCINA.2B@9409.58,6274.62
GND: "Lado A-Linea  1-4.16" "Lado A-Linea  1-4.17" "Lado A-Linea  5-8.16" "Lado A-Linea  5-8.17" "Lado B-Linea  1-4.16" "Lado B-Linea  1-4.17" "Lado B-Linea  5-8.16" "Lado B-Linea  5-8.17" "TRIGGER C1.2" "TRIGGER C1.3" "TRIGGER C1.4" "TRIGGER C1.5" +5V.2 BOCINA.1A BOTON.1 BOTON.2 BOTON.3 BOTON.5 C1.2 C2.2 C3.2 C4.2 C5.2 CAL1_UC.2 CAL1_UI_A.2 CAL1_UI_B.2 CAL1_UI_C.2 CAL1_UI_D.2 CAL1_UI_E.2 CAL1_UI_F.2 CAL1_UI_G.2 CAL1_UI_H.2 CENTRADA.2 Con_Leds.2 Con_Leds.4 Con_Leds.6 Con_Leds.8 Con_Leds.10 Con_Leds.12 Con_Leds.14 Con_Leds.16 Con_Leds.18 GND1.1 GND.1 J1.2 J1.2A J1.2B J1.3 J1.3A J1.3B J2.4 J2.5 J2.6 J_2.1 J_3.1 P1_UC.1 P1_UI_A.1 P1_UI_B.1 P1_UI_C.1 P1_UI_D.1 P1_UI_E.1 P1_UI_F.1 P1_UI_G.1 P1_UI_H.1 P6_UC.1 P6_UI_A.1 P6_UI_B.1 P6_UI_C.1 P6_UI_D.1 P6_UI_E.1 P6_UI_F.1 P6_UI_G.1 P6_UI_H.1 pad.1@942.73,6425.72 pad.2@1139.58,6543.83 pad.2@3649.58,4649.11 pad.4 pad.7 pad.10 pad.13 pad.16 pad.19 pad.22 pad.26 pad.31 pad.34 pad.37 pad.40 pad.42 pad.45 pad.47 pad.50 r9.2 r10.1 R12.2 Start.1A U7.2 U7.4 U9.11 | length 29820.3
  Top Layer w15: J1.3B@942.73,6386.35 942.73,6184.27 1096,6031 R12.2@1096,5818.4 ; v1(1579.58,6159.11) 1707.38,6286.91 J2.4@1770.37,6286.91 ; v1(2319.58,369.11) 2749.58,799.11 v1(2869.58,799.11) ; v1(2919.58,2179.11) 3219.58,1879.11 3429.58,1879.11 v1(3439.58,1869.11) ; v1@3029.58,5079.11 v1(3039.58,5079.11) v1(3289.58,5079.11) ; v1(3039.58,3459.11) 3079.58,3459.11 v1(3399.58,3779.11) ; v2(3683,5016) 3652.16,4985.16 3652.16,4651.69 P1_UC.1@3649.58,4649.11 3649.58,4055.42 3689.58,4015.42 v1(3689.58,3859.11) 3819.58,3859.11 v1(3859.58,3819.11) ; 3731.91,6426.98 3926.89,6232 5325,6232 5408.57,6315.57 5408.57,6426.98 ; BOTON.2@4829.58,3719.11 4829.58,3649.11 4949.58,3529.11 5249.58,3529.11 5319.58,3599.11 5319.58,3669.11 5209.58,3779.11 v1(5169.58,3779.11) ; v1(5699.58,3779.11) v1(5919.58,3779.11) ; Con_Leds.2@5709.58,4039.11 6039.58,4039.11 6449.58,3629.11 v1(6499.58,3629.11) 6529.58,3629.11 6559.58,3599.11 6559.58,2869.11 6669.58,2759.11 6669.58,2479.11 6739.58,2409.11 v1(6739.58,2029.11) v1@6749.58,2019.11 ; P6_UI_B.1@6749.58,3129.11 v1(6749.58,3549.11) ; 8761.91,6430.92 8761.91,5875.09 8786,5851 8976,5851 9009.58,5884.58 U9.11@9009.58,5934.62 ; r9.2@9166.98,6349.11 r10.1@9166.98,6439.11 9341.48,6439.11 BOCINA.1A@9381.79,6479.42 ; P1_UI_D.1@9349.58,1089.11 9359.58,1079.11 v1(9539.58,1079.11) ; P1_UI_B.1@9349.58,4029.11 9349.58,3899.11 9409.58,3839.11 v1(9409.58,3339.11) ; v1(9726.98,5601.98) C3.2@9726.98,5799.11
  Bottom Layer w15: J_3.1@359.58,6139.11 514.11,6139.11 616,6241 616,6431 535.37,6511.63 Start.1A@439.58,6511.63 ; v1(1579.58,6159.11) 1579.58,6390.61 J2.5@1582.57,6393.6 ; v1(2319.58,369.11) 2329.58,359.11 2649.58,359.11 2688.73,398.26 C5.2@2688.73,459.11 ; U7.2@2683.76,699.11 2769.58,699.11 ; v1(2869.58,799.11) 2769.58,699.11 ; v1(2919.58,2179.11) 2919.58,2199.11 3029.58,2309.11 P6_UI_G.1@3029.58,2609.11 ; P6_UI_F.1@3029.58,4079.11 3029.58,3469.11 v1(3039.58,3459.11) ; v1@3029.58,5079.11 P6_UI_E.1@3029.58,5549.11 ; v1(3289.58,5079.11) 3492.18,5281.71 CAL1_UC.2@3649.58,5281.71 3649.58,5117.42 3683,5084 v2(3683,5016) ; v1(3399.58,3779.11) 3479.58,3859.11 v1(3689.58,3859.11) ; v1(3859.58,3819.11) 4479.58,3819.11 4579.58,3719.11 BOTON.1@4729.58,3719.11 BOTON.2@4829.58,3719.11 ; +5V.2@3899.58,2209.11 3779.58,2209.11 v1(3439.58,1869.11) 3439.58,1689.11 3029.58,1279.11 P6_UI_H.1@3029.58,1139.11 3220.69,948 GND.1@3393,948 3384,939 3384,907 3267.21,790.21 3010.68,790.21 2919.58,699.11 2769.58,699.11 ; 4096.76,6426.98 4168,6355.75 4168,6063 4476,5755 6074,5755 6249.58,5579.42 P6_UC.1@6249.58,5549.11 ; BOTON.5@4829.58,3819.11 BOTON.2@4829.58,3719.11 ; Con_Leds.18@4909.58,4039.11 Con_Leds.16@5009.58,4039.11 Con_Leds.14@5109.58,4039.11 Con_Leds.12@5209.58,4039.11 Con_Leds.10@5309.58,4039.11 Con_Leds.8@5409.58,4039.11 Con_Leds.6@5509.58,4039.11 Con_Leds.4@5609.58,4039.11 Con_Leds.2@5709.58,4039.11 5709.58,3989.11 v1(5919.58,3779.11) ; BOTON.3@4929.58,3719.11 BOTON.2@4829.58,3719.11 ; v1(5169.58,3779.11) v1(5699.58,3779.11) ; 6202,2577 6202,2566.69 v1(6739.58,2029.11) 6739.58,1669.11 P6_UI_C.1@6749.58,1659.11 ; v1(6499.58,3629.11) 6659.58,3629.11 6739.58,3549.11 v1(6749.58,3549.11) ; P1_UI_B.1@9349.58,4029.11 9349.58,4144.58 9396,4191 9396,4431 9299,4528 9299,4774 9351.51,4826.51 CAL1_UI_A.2@9459.58,4826.51 9459.58,5127.42 9349.58,5237.42 P1_UI_A.1@9349.58,5549.11 9674.11,5549.11 v1(9726.98,5601.98) ; v1(9409.58,3339.11) 9459.58,3339.11 9586.98,3211.71 CAL1_UI_B.2@9586.98,3059.11 ; v1(9539.58,1079.11) 9546.98,1086.51 CAL1_UI_C.2@9546.98,1599.11
GND_ISO: "Lado A-Linea  1-4.7" "Lado A-Linea  1-4.8" "Lado A-Linea  1-4.14" "Lado A-Linea  1-4.15" "Lado A-Linea  5-8.7" "Lado A-Linea  5-8.8" "Lado A-Linea  5-8.14" "Lado A-Linea  5-8.15" "Lado B-Linea  1-4.7" "Lado B-Linea  1-4.8" "Lado B-Linea  1-4.14" "Lado B-Linea  1-4.15" "Lado B-Linea  5-8.7" "Lado B-Linea  5-8.8" "Lado B-Linea  5-8.14" "Lado B-Linea  5-8.15" J_7.1 R12.1 | length 10252.4
  Top Layer w15: R12.1@1096,5743.6 1255.09,5743.6 J_7.1@1259.58,5739.11 1344.11,5739.11 1366,5761 1366,6461 1486,6581 3266,6581 3294.11,6552.89 3294.11,6482.89 3348.64,6428.36 3348.64,6371.08 3457.69,6371.08 3403.17,6425.61 3403.17,6482.89 ; 3296,6481 3297.89,6482.89 3403.17,6482.89 ; v1(4266,6551) 4226,6591 3546,6591 3437.89,6482.89 3403.17,6482.89 ; 4966,6481 4967.89,6482.89 4970.78,6482.89 ; 6646,6481 6646,6427.05 6701.97,6371.08 6811.03,6371.08 6756.5,6425.61 6756.5,6482.89 6647.44,6482.89 ; 8324.11,6486.83 8326,6486.83 ; 8326,6491 8326,6486.83 ; 4970.78,6482.89 4970.78,6425.61 5025.3,6371.08 5134.36,6371.08 5079.83,6425.61 5079.83,6482.89 4970.78,6482.89 ; 8326,6486.83 8433.16,6486.83 8487.69,6432.3 8487.69,6375.02 8378.64,6375.02 8326,6427.65 8326,6486.83
  Bottom Layer w15: v1(4266,6551) 4266,6561 4296,6591 4926,6591 4970.78,6546.22 4970.78,6482.89 ; 5079.83,6482.89 5079.83,6534.83 5146,6601 6576,6601 6647.44,6529.56 6647.44,6482.89 ; 6756.5,6482.89 6756.5,6531.5 6826,6601 8318.99,6601 8433.16,6486.83
NetC3_1: C3.1 Qbocina.1 R11.2 U9.1 | length 877.8
  Top Layer w15: R11.2@9166.98,6259.11 9166.98,6209.11 9159.58,6201.71 U9.1@9159.58,6123.6 9265.09,6123.6 v1(9269.58,6119.11) ; Qbocina.1@9589.58,5979.11 9639.58,5929.11 9639.58,5811.71 C3.1@9652.18,5799.11
  Bottom Layer w15: v1(9269.58,6119.11) 9279.58,6129.11 9499.58,6129.11 9589.58,6039.11 Qbocina.1@9589.58,5979.11
NetJ_4_1: J_4.1
NetJ_6_1: J_6.1
NetQ3_2: Q3.2 R_BOTON.1 | length 85.6
  Top Layer w15: Q3.2@4518.79,3746.51 4518.79,3821.79 R_BOTON.1@4526.12,3829.11
NetQ3_3: Q3.3 Q4.1 | length 1134.3
  Top Layer w15: v1(4329.58,3619.11) 4330.37,3619.11 Q3.3@4420.37,3709.11
  Bottom Layer w15: Q4.1@4039.58,2989.11 3989.58,2989.11 3949.58,3029.11 3949.58,3499.11 4069.58,3619.11 v1(4329.58,3619.11)
Netr9_1: r9.1 R11.1 U9.2 | length 232.7
  Top Layer w15: r9.1@9092.18,6349.11 R11.1@9092.18,6259.11 9092.18,6226.51 9109.58,6209.11 U9.2@9109.58,6123.6
VCC: 5V.1 +5V.3 C2.1 C4.1 J_1.1 Q3.1 U7.1 | length 15087.2
  Top Layer w15: v1(176,5281) 256,5201 256,1621 306,1571 v1(1766,1571) ; v1(2759.58,359.11) 2949.58,549.11 2949.58,919.11 2869.58,999.11 2749.58,999.11 2679.58,1069.11 2679.58,1219.11 v1(2719.58,1259.11) 3131.58,1259.11 3183.69,1207 v1(3184,1207) ; 5V.1@3393,658 3269,658 3238,689 3238,1104.89 3889.11,1756 C2.1@3889.11,1939.11 3959.58,1939.11 3979.58,1959.11 3979.58,2069.11 3939.58,2109.11 +5V.3@3899.58,2109.11 ; v1(4049.58,2229.11) 4049.58,2549.11 3929.58,2669.11 3929.58,3299.11 4119.58,3489.11 4336.2,3489.11 Q3.1@4518.79,3671.71
  Bottom Layer w15: v1(176,5281) 176,5631 284.11,5739.11 J_1.1@359.58,5739.11 ; v1(1766,1571) 2016,1571 2079,1508 2079,1008 2126,961 2406,961 2476,1031 2476,1237.22 2497.89,1259.11 v1(2719.58,1259.11) 2729.58,1259.11 2779.58,1209.11 2779.58,1031.71 C4.1@2676.98,929.11 ; U7.1@2683.76,789.66 C4.1@2683.76,922.34 ; v1(3184,1207) 3184,1343.53 3709.58,1869.11 3709.58,1989.11 3829.58,2109.11 +5V.3@3899.58,2109.11 4009.58,2109.11 4049.58,2149.11 v1(4049.58,2229.11)
VCC_BOTON: BOTON.6 Q4.3 | length 1521.8
  Bottom Layer w15: Q4.3@4039.58,3189.11 4039.58,3399.11 4189.58,3549.11 4919.58,3549.11 5009.58,3639.11 5009.58,3789.11 4979.58,3819.11 BOTON.6@4929.58,3819.11
VCC_EXT: +5V.1 C1.1 CENTRADA.1 J1.1 J1.1A J1.1B pad.0@1139.58,6299.74 Q4.2 Qbocina.2 U9.4 | length 15466.2
  Top Layer w15: v1(1709.58,5889.11) 2039.58,5889.11 2159.58,6009.11 v1(3159.58,6009.11) ; v1(3819.58,5689.11) 5829.58,5689.11 5909.58,5769.11 6229.58,5769.11 6673.74,6213.26 ; C1.1@3889.11,2489.11 3969.58,2489.11 3989.58,2469.11 3989.58,2369.11 3929.58,2309.11 +5V.1@3899.58,2309.11 ; 6747.74,6287.27 6673.74,6213.26 ; Qbocina.2@9489.58,5979.11 9489.58,5929.11 9459.58,5899.11 9329.58,5899.11 9209.58,6019.11 9039.58,6019.11 9009.58,6049.11 U9.4@9009.58,6123.6 9009.58,6199.11 8936,6272.69 8936,6491 8857.89,6569.11 6964.11,6569.11 6921.85,6526.85 6921.85,6316.85 6896,6291 6751.47,6291 6673.74,6213.26
  Bottom Layer w15: J1.1B@1188.79,6299.74 1338.95,6299.74 1493.42,6145.28 1493.42,6105.28 v1(1709.58,5889.11) v1@1699.58,5889.11 ; v1(3819.58,5689.11) 3779.58,5689.11 3459.58,6009.11 v1(3159.58,6009.11) 3159.58,5989.11 3219.58,5929.11 3219.58,4699.11 3289.58,4629.11 3289.58,2509.11 3489.58,2309.11 +5V.1@3899.58,2309.11 4069.58,2309.11 4139.58,2379.11 4139.58,3059.11 4109.58,3089.11 Q4.2@4039.58,3089.11
VCC_ISO: "Lado A-Linea  1-4.5" "Lado A-Linea  1-4.6" "Lado A-Linea  1-4.13" "Lado A-Linea  5-8.5" "Lado A-Linea  5-8.6" "Lado A-Linea  5-8.13" "Lado B-Linea  1-4.5" "Lado B-Linea  1-4.6" "Lado B-Linea  1-4.13" "Lado B-Linea  5-8.5" "Lado B-Linea  5-8.6" "Lado B-Linea  5-8.13" J_5.1 | length 11483.7
  Top Layer w15: 3185.06,6482.89 3185.06,6425.61 ; 3186,6481 3186,6426.55 3185.06,6425.61 ; v1(3566,6511) 3606,6551 3886,6551 3926,6511 3926,6351 3996,6281 4776,6281 4807.19,6312.19 4807.19,6371.08 ; 4866,6481 4916.25,6430.75 4916.25,6371.08 4807.19,6371.08 ; 6483.86,6371.08 6483.86,6428.36 6538.39,6482.89 ; 6486,6371 6592.84,6371 6592.92,6371.08 6592.92,6428.36 6538.39,6482.89 ; 8215.05,6486.83 8215.05,6429.54 8160.53,6375.02 8269.58,6375.02 8216,6428.6 8216,6481 ; v1(9026,6531) 9026,6551 8976,6601 6656.5,6601 6538.39,6482.89 ; 3185.06,6425.61 3130.53,6371.08 3239.58,6371.08 3185.06,6425.61 ; 4807.19,6371.08 4807.19,6428.36 4861.72,6482.89 4861.72,6545.28 4907.44,6591 6476,6591 6531.25,6535.75 6531.25,6490.03 6538.39,6482.89
  Bottom Layer w15: J_5.1@1259.58,6039.11 1497.69,5801 2116,5801 2576,6261 2576,6451 2666,6541 3126.94,6541 3185.06,6482.89 ; 3239.58,6371.08 3239.58,6327.42 3286,6281 3476,6281 3566,6371 v1(3566,6511) ; 8269.58,6375.02 8269.58,6337.42 8336,6271 8906,6271 9026,6391 v1(9026,6531)
pads on no net: Con_Leds.33 U9.5 U9.6 U9.7 U9.8 U9.9 U9.10 U9.12 U9.13 U9.14
copper on no net: | length 69574
  Top Layer w10: -162,-174 10077,-174 10077,6935 -162,6935 -162,-174
  Bottom Layer w10: -173,-228 -173,6943 10095,6943 10095,-228 -173,-228

## Polygon pours and split planes (outlines as drawn)
GND on Top Layer "Top Layer" (solid, remove dead copper, pour order 1001): 9.58,6639.11 9.58,-0.89 9842.1,-0.89 9842.1,6639.11 9.58,6639.11
GND on Bottom Layer "Bottom Layer" (solid, remove dead copper, pour order 1000): 8,6638 8,-2 9840.52,-2 9840.52,6638 8,6638

## Other copper
Top Layer:
  pour cut-out: 4231.87,3424.31 4231.87,1749.11 5806.67,1749.11 5806.67,3424.31
Bottom Layer:
  pour cut-out: 4231.87,3424.31 4231.87,1749.11 5806.67,1749.11 5806.67,3424.31

## Silkscreen, mask and mechanical layers (free items; w line width, h text height)
Mechanical 1:
  lines w3.94: 4231.87,1749.11 5806.67,1749.11
  lines w10: 4231.87,1749.11 4231.87,3424.31 5806.67,3424.31 5806.67,1749.11
  lines w30: -0.42,-0.89 -0.42,6639.11 9839.58,6639.11 9839.58,-0.89 -0.42,-0.89

## Text inside footprints (layer, text, board x,y; h text height)
+5V: Top Overlay "3" at 3735.21,2128.8 h59.06 r270; Top Overlay "2" at 3735.21,2228.8 h59.06 r270; Top Overlay "1" at 3735.21,2318.95 h59.06 r270
BOTON: Top Overlay "4" at 4629.58,3799.11 h50; Top Overlay "1" at 4649.58,3699.11 h50; Top Overlay "3" at 5009.58,3699.11 h50; Top Overlay "6" at 5009.58,3799.11 h50
CENTRADA: Top Overlay "+" at 2009.58,5989.11 h59.06 r270
Con_Leds: Top Overlay "34" at 4049.58,4059.11 h50 r180; Top Overlay "33" at 4049.58,4159.11 h50 r180; Top Overlay "1" at 5829.58,4159.11 h50 r180; Top Overlay "2" at 5829.58,4059.11 h50 r180
J2: Mechanical 1 "PCB Edge" at 2042.08,6786.31 h9.84 r180
"Lado A-Linea  1-4": Top Overlay "1" at 7714.46,6235.06 h59.06; Top Overlay "8" at 8486,6235.06 h59.06; Top Overlay "15" at 8388.87,6609.07 h59.06; Top Overlay "9" at 7759.15,6609.07 h59.06
"Lado A-Linea  5-8": Top Overlay "6" at 6246.07,6605.13 h59.06; Top Overlay "9" at 6573.23,6605.13 h59.06; Top Overlay "5" at 6627.76,6235.06 h59.06; Top Overlay "1" at 6201.38,6235.06 h59.06
"Lado B-Linea  1-4": Top Overlay "6" at 4569.4,6605.13 h59.06; Top Overlay "9" at 4896.56,6605.13 h59.06; Top Overlay "5" at 4951.09,6235.06 h59.06; Top Overlay "1" at 4524.71,6235.06 h59.06
"Lado B-Linea  5-8": Top Overlay "6" at 2892.73,6605.13 h59.06; Top Overlay "9" at 3219.9,6605.13 h59.06; Top Overlay "5" at 3274.43,6235.06 h59.06; Top Overlay "1" at 2848.05,6235.06 h59.06
Q4: Top Overlay "1" at 4190.17,2979.27 h59.06 r90; Top Overlay "2" at 4190.17,3069.42 h59.06 r90; Top Overlay "3" at 4190.17,3169.42 h59.06 r90
Qbocina: Top Overlay "1" at 9599.42,6129.7 h59.06 r180; Top Overlay "2" at 9509.27,6129.7 h59.06 r180; Top Overlay "3" at 9409.27,6129.7 h59.06 r180
Start: Mechanical 1 "PCB Edge" at 621.39,6656 h9.84 r180